# Altium PCB Consult.PcbDoc
Units mm, origin at the board's own origin, x right, y up, seen from the top; angles counter-clockwise.
Board outline 100.08 x 100.03 mm, 2 copper layers (Top Layer, Bottom Layer); 59 components, 40 nets, 265 pads, 0 vias.
Unrouted connection lines stored in the file: 143.
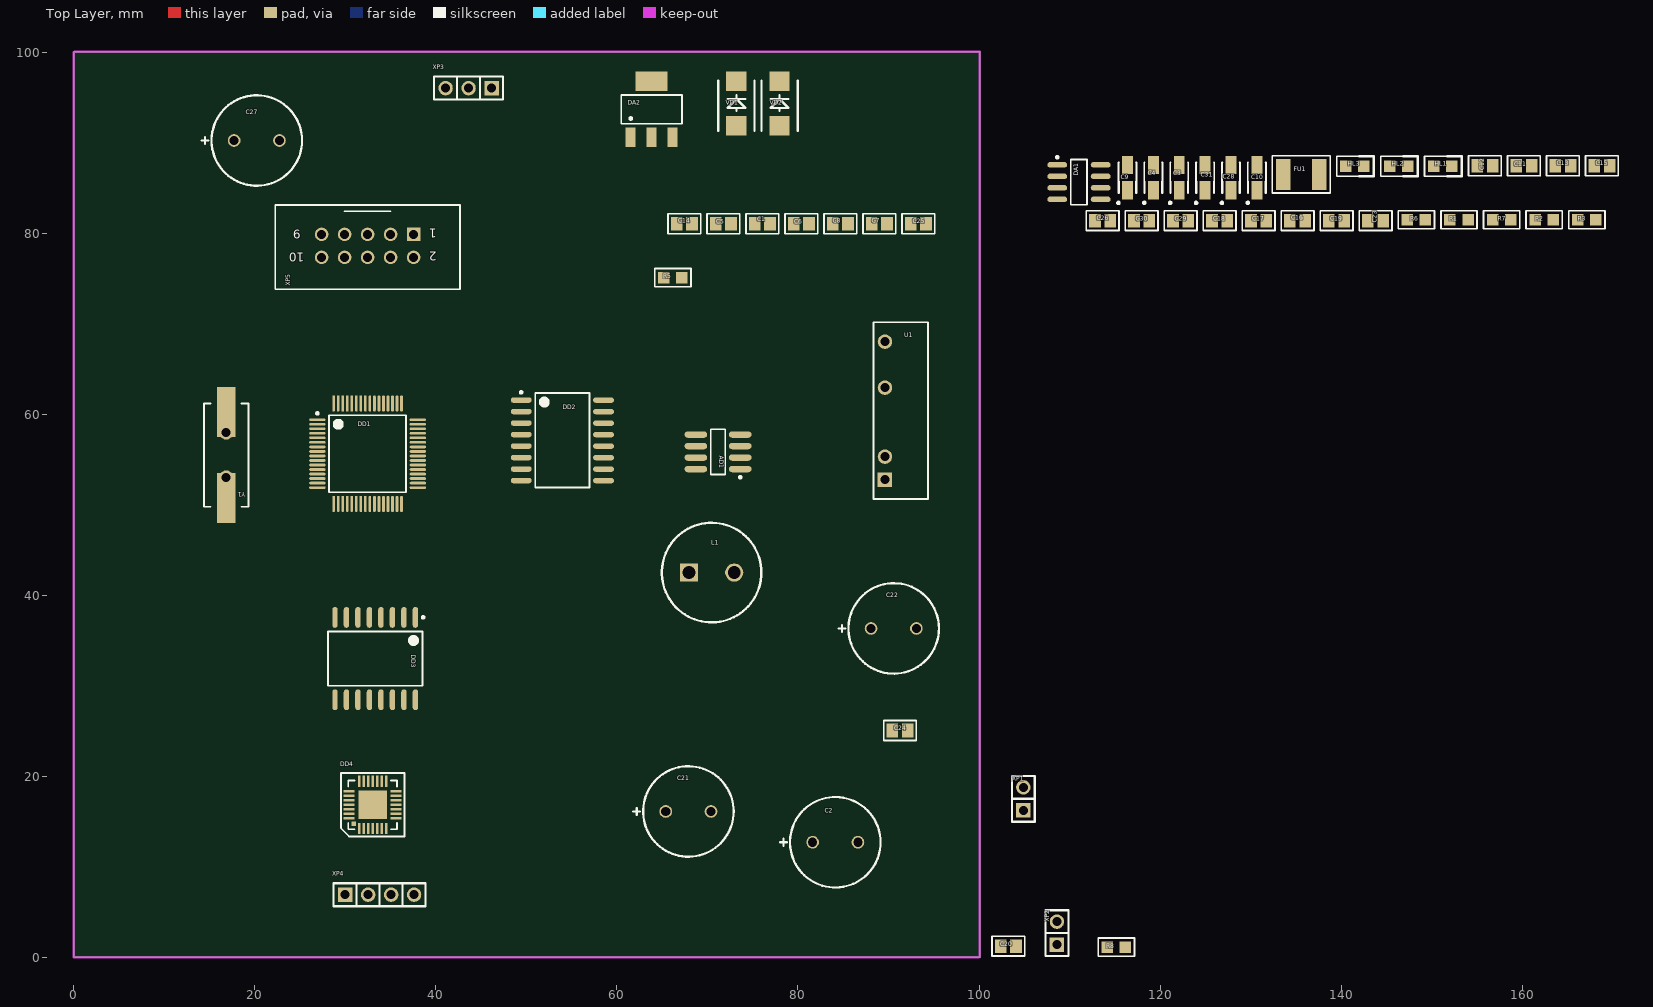
[diagram p0: Top Layer view]
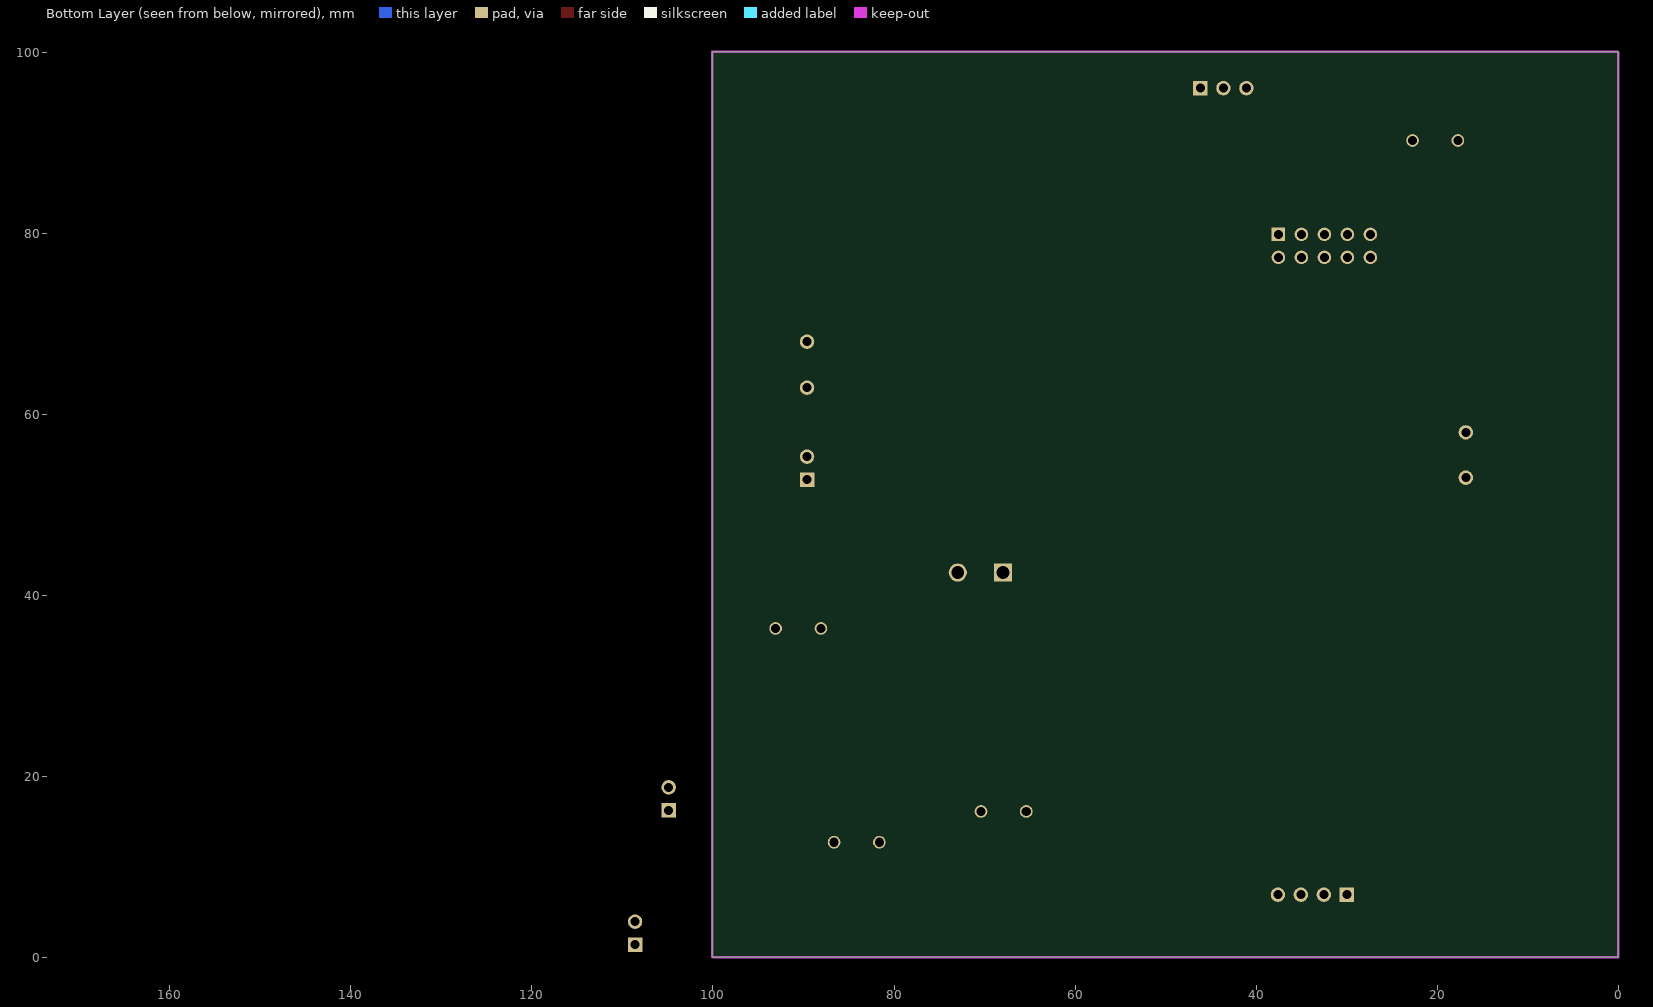
[diagram p1: Bottom Layer view, seen from below]

## Layer stack, top to bottom
Top Solder: solder mask 0.0102, Solder Resist, Dk 3.5
Top Layer: signal copper 0.0356
Dielectric 1: dielectric 0.32, FR-4, Dk 4.8
Bottom Layer: signal copper 0.0356
Bottom Solder: solder mask 0.0102, Solder Resist, Dk 3.5

## Board outline
0,0.025 100,0.025 100.076,0.051 100.076,100.051 0.076,100.051 0,100.025

## Design rules (kind name [scope] priority, off if disabled: settings)
Clearance Clearance_poly [inpolygon] p1: gap=0.3 ignorepadtopadclearanceinfootprint=FALSE
Clearance [All] p2: gap=0.2 ignorepadtopadclearanceinfootprint=FALSE
HoleSize [All] p1: absolutevalues=TRUE maxlimit=5 minlimit=0.3 maxpercent=80.000 minpercent=20.000
MinimumSolderMaskSliver [All] p1: minsoldermaskwidth=0.1
MinimumSolderMaskSliver SilkscreenOverComponentPads [All] p2: minsoldermaskwidth=0.254
PolygonConnect PolygonConnect_vias [isvia] p1: connectstyle=Direct reliefconductorwidth=0.254 reliefentries=4 polygonreliefangle="90 Angle" airgapwidth=0.254
PolygonConnect [All] p2: connectstyle=Relief reliefconductorwidth=0.25 reliefentries=4 polygonreliefangle="90 Angle" airgapwidth=0.254
RoutingVias [All] p1: holewidth=0.4 width=0.8 viastyle="Through Hole" minholewidth=0.4 minwidth=0.8 maxholewidth=0.4 maxwidth=0.8
SolderMaskExpansion SolderMaskExpansion_vias [isvia] p1: expansion=-2 istentingtop=FALSE
SolderMaskExpansion [All] p2: expansion=0.1 istentingtop=FALSE
SupplyNets "Schematic Supply Nets_2" [InNet('3.3V')] p1: voltage=0.000
SupplyNets "Schematic Supply Nets_1" [InNet('-12B')] p2: voltage=0.000
SupplyNets "Schematic Supply Nets" [InNet('GND')] p3: voltage=0.000
Width [All] p1: maxlimit=8 minlimit=0.25 preferedwidth=0.25
28 further rules are at their usual default settings.

## Components (designator, comment, footprint, x,y, rotation, side; value= is the part's Value field where it differs from the comment)
AD1 "MC33660" SO-8_M 71.171,55.855 r180 top
C1 "0.1uF" cap0805 76.074,81.057 r0 top
C2 "470uF" "ECR-EHR 10mm" 84.125,12.725 r0 top
C3 "6.8uF" TC3216-1206-A 122.119,86.156 r90 top
C4 "6.8uF" TC3216-1206-A 119.261,86.156 r90 top
C5 "0.1uF" cap0805 71.766,81.057 r0 top
C6 "0.1uF" cap0805 80.382,81.057 r0 top
C7 "2.2uF" cap0805 88.998,81.057 r0 top
C8 "2.2uF" cap0805 84.69,81.057 r0 top
C9 "6.8uF" TC3216-1206-A 116.403,86.156 r90 top
C10 "6.8uF" TC3216-1206-A 130.693,86.156 r90 top
C11 "0.1uF" cap0805 160.198,87.457 r0 top
C12 "0.1uF" cap0805 155.89,87.457 r0 top
C13 "0.1uF" cap0805 164.506,87.457 r0 top
C14 "0.1uF" cap0805 67.458,81.057 r0 top
C15 "0.1uF" cap0805 168.814,87.457 r0 top
C16 "0.1uF" cap0805 135.19,81.398 r0 top
C17 "20pF" cap0805 130.882,81.398 r0 top
C18 "20pF" cap0805 126.574,81.398 r0 top
C19 "0.1uF" cap0805 139.498,81.398 r0 top
C20 "0.01uF" cap0805 103.251,1.245 r0 top
C21 "470uF" "ECR-EHR 10mm" 67.894,16.129 r0 top
C22 "470uF" "ECR-EHR 10mm" 90.576,36.347 r0 top
C23 "0.1uF" cap0805 143.806,81.398 r0 top
C24 "0.1uF" cap0805 91.274,25.07 r0 top
C25 "0.1uF" cap0805 93.306,81.057 r0 top
C26 "10nF" cap0805 113.65,81.398 r0 top
C27 "470uF" "ECR-EHR 10mm" 20.218,90.246 r0 top
C28 "6.8uF" TC3216-1206-A 127.835,86.156 r90 top
C29 "0.1uF" cap0805 122.266,81.398 r0 top
C30 "0.1uF" cap0805 117.958,81.398 r0 top
C31 "6.8uF" TC3216-1206-A 124.977,86.156 r90 top
DA1 "LM2675M-5" SO-8 111.044,85.652 r0 top
DA2 "LD1117S33" SOT223 63.824,93.691 r0 top
DD1 "STM32F405RGT6" LQFP64 32.461,55.651 r0 top
DD2 "ADUM1402ARW" WSO-16 53.975,57.125 r0 top
DD3 "ADUM1402ARW" WSO-16 33.299,33.02 r270 top
DD4 "CP2103" QFN-28 33.02,16.866 r0 top
FU1 "miniSMDC014F" 1812 135.601,86.507 r0 top
HL1 "KP-2012SGC" Led0805 151.23,87.405 r0 top
HL2 "KP-2012SGC" Led0805 146.37,87.405 r0 top
HL3 "KP-2012SGC" Led0805 141.509,87.405 r0 top
L1 "RLB0914-470KL" RLB0914 70.46,42.52 r0 top
R1 "330" res0805 153.022,81.498 r0 top
R2 "330" res0805 162.438,81.498 r0 top
R3 "330" res0805 167.146,81.498 r0 top
R5 "4.7k" res0805 66.19,75.097 r0 top
R6 "1M" res0805 148.314,81.498 r0 top
R7 "10k" res0805 157.73,81.498 r0 top
R8 "10k" res0805 115.164,1.143 r0 top
U1 "AM1D-0505SH30N" SIP7S 91.389,60.401 r90 top
VD1 "10BQ060" SMB 73.205,94.336 r90 top
VD2 "P6SMBJ12" SMB 77.963,94.336 r90 top
XP1 "PLS-2" PLS2 104.902,17.526 r0 top
XP2 "PLS-2" PLS2 108.61,2.692 r0 top
XP3 "PLS-3" PLS3 43.612,96.037 r90 top
XP4 "PLS-4" PLS4 33.782,6.934 r270 top
XP5 "IDC-10" IDC-10 32.461,78.613 r180 top
Y1 "8MHz" XT49M 16.84,55.499 r270 top

## Footprints (in the part's own frame and the unit in brackets; to place one, negate y for a bottom-side part, rotate by r counter-clockwise, add the part's x,y. Pads: shape width x height; smd on the part's side, far side on the other; paste and mask are expansions set on the pad)
1812 [mm]
  rect 1.6x3.4 smd: 1(-2,0) 2(2,0)
  silkscreen extent -3.2,-2.05 3.2,2.05, body extent -2.35,-1.7 2.35,1.7, height 0.9
cap0805 [mm]
  rect 1.3x1.5 smd: 1(-0.85,0) 2(0.85,0)
  silkscreen extent -1.8,-1.1 1.8,1.1, body extent -1,-0.62 1,0.62, height 0.61
"ECR-EHR 10mm" [mm] "HITANO ECR/EHR capacitor D=10mm"
  round 1.4 hole 1: 1(-2.5,0) 2(2.5,0)
  silkscreen extent -6.1,-5 5,5
IDC-10 [mm]
  rect 1.5x1.5 hole 1: 1(-5.08,-1.27)
  round 1.5 hole 1: 2(-5.08,1.27) 3(-2.54,-1.27) 4(-2.54,1.27) 5(0,-1.27) 6(0,1.27) 7(2.54,-1.27) 8(2.54,1.27) 9(5.08,-1.27) 10(5.08,1.27)
  silkscreen extent -10.2,-4.5 10.2,4.8, body extent -10.2,-4.45 10.2,4.9, height 9.35
Led0805 [mm]
  rect 1.27x1.27 smd: 1(-1,0) 2(1,0)
  silkscreen extent -2,-1.1 2.1,1.1, body extent -1.01,-0.62 1.01,0.62, height 1.11
LQFP64 [mm] "Thin QFP, 64-Leads, Body 10x10mm, Pitch 0.5mm, IPC Medium Density"
  oval 1.8x0.3 smd: 1(-5.55,3.75) 2(-5.55,3.25) 3(-5.55,2.75) 4(-5.55,2.25) 5(-5.55,1.75) 6(-5.55,1.25) 7(-5.55,0.75) 8(-5.55,0.25) 9(-5.55,-0.25) 10(-5.55,-0.75) 11(-5.55,-1.25) 12(-5.55,-1.75) 13(-5.55,-2.25) 14(-5.55,-2.75) 15(-5.55,-3.25) 16(-5.55,-3.75) 33(5.55,-3.75) 34(5.55,-3.25) 35(5.55,-2.75) 36(5.55,-2.25) 37(5.55,-1.75) 38(5.55,-1.25) 39(5.55,-0.75) 40(5.55,-0.25) 41(5.55,0.25) 42(5.55,0.75) 43(5.55,1.25) 44(5.55,1.75) 45(5.55,2.25) 46(5.55,2.75) 47(5.55,3.25) 48(5.55,3.75)
  oval 0.3x1.8 smd: 17(-3.75,-5.55) 18(-3.25,-5.55) 19(-2.75,-5.55) 20(-2.25,-5.55) 21(-1.75,-5.55) 22(-1.25,-5.55) 23(-0.75,-5.55) 24(-0.25,-5.55) 25(0.25,-5.55) 26(0.75,-5.55) 27(1.25,-5.55) 28(1.75,-5.55) 29(2.25,-5.55) 30(2.75,-5.55) 31(3.25,-5.55) 32(3.75,-5.55) 49(3.75,5.55) 50(3.25,5.55) 51(2.75,5.55) 52(2.25,5.55) 53(1.75,5.55) 54(1.25,5.55) 55(0.75,5.55) 56(0.25,5.55) 57(-0.25,5.55) 58(-0.75,5.55) 59(-1.25,5.55) 60(-1.75,5.55) 61(-2.25,5.55) 62(-2.75,5.55) 63(-3.25,5.55) 64(-3.75,5.55)
  silkscreen extent -5.67,-4.25 4.25,4.57, body extent -6,-6 6,6, height 1.6
PLS2 [mm]
  rect 1.6x1.6 hole 1: 1(0,-1.27)
  round 1.6 hole 1: 2(0,1.27)
  silkscreen extent -1.27,-2.54 1.27,2.53, body extent -1.27,-2.54 1.27,2.54, height 8.54
PLS3 [mm]
  rect 1.6x1.6 hole 1: 1(0,-2.54)
  round 1.6 hole 1: 2(0,0) 3(0,2.54)
  silkscreen extent -1.27,-3.81 1.27,3.81, body extent -1.27,-3.81 1.27,3.81, height 8.44
PLS4 [mm]
  rect 1.6x1.6 hole 1: 1(0,-3.81)
  round 1.6 hole 1: 2(0,-1.27) 3(0,1.27) 4(0,3.81)
  silkscreen extent -1.27,-5.08 1.27,5.08, body extent -1.27,-5.08 1.27,5.08, height 8.44
QFN-28 [mil]
  rect 124.02x124.02 smd: 0(0,0)
  rect 11x48 smd: 1(-59.05,-102.36) 2(-39.37,-102.36) 3(-19.69,-102.36) 4(0,-102.36) 5(19.68,-102.36) 6(39.38,-102.36) 7(59.07,-102.36) 15(59.07,102.35) 16(39.38,102.35) 17(19.68,102.35) 18(0,102.35) 19(-19.69,102.35) 20(-39.37,102.35) 21(-59.05,102.35)
  rect 48x11 smd: 8(102.36,-59.06) 9(102.36,-39.36) 10(102.36,-19.68) 11(102.36,0) 12(102.36,19.68) 13(102.36,39.37) 14(102.36,59.06) 22(-102.35,59.06) 23(-102.35,39.37) 24(-102.35,19.68) 25(-102.35,0) 26(-102.35,-19.68) 27(-102.35,-39.36) 28(-102.35,-59.06)
  rect 19.66x19.66 smd: 29(-82.67,-82.68)
  silkscreen extent -138,-138 138,138, body extent -99,-99 99,99, height 36
res0805 [mm]
  rect 1.27x1.27 smd: 1(-1,0) 2(1,0)
  silkscreen extent -2,-1 2,1, body extent -1,-0.62 1,0.62, height 0.61
RLB0914 [mm]
  rect 2x2 hole 1.4: 1(-2.5,0)
  round 2 hole 1.4: 2(2.5,0)
  silkscreen extent -5.5,-5.5 5.5,5.5, body extent -4.35,-4.35 4.35,4.35, height 12.3
SIP7S [mm]
  rect 1.6x1.6 hole 1: 1(-7.62,1.778)
  round 1.6 hole 1: 2(-5.08,1.778) 3(2.54,1.778) 4(7.62,1.778)
  silkscreen extent -9.77,-2.97 9.78,3.05, body extent -9.99,-2.71 10.01,3.29, height 9.31
SMB [mm]
  rect 2.16x2.26 smd: 1(-2.45,0) 2(2.45,0)
  silkscreen extent -3,-2 2.5,2, body extent -3,-1.95 2.5,1.95, height 2.42
SO-8 [mm] "8-Pin Small Outline Integrated Circuit 1.27 mm Pitch, IPC Medium Density"
  oval 2.2x0.6 smd: 1(-2.4,1.905) 2(-2.4,0.635) 3(-2.4,-0.635) 4(-2.4,-1.905) 5(2.4,-1.905) 6(2.4,-0.635) 7(2.4,0.635) 8(2.4,1.905)
  silkscreen extent -2.52,-2.5 0.9,2.88, body extent -3,-2.45 3,2.45, height 1.6
SO-8_M [mm] "8-Pin Small Outline Integrated Circuit 1.27 mm Pitch, IPC Low Density"
  oval 2.5x0.7 smd: 1(-2.45,1.905) 2(-2.45,0.635) 3(-2.45,-0.635) 4(-2.45,-1.905) 5(2.45,-1.905) 6(2.45,-0.635) 7(2.45,0.635) 8(2.45,1.905)
  silkscreen extent -2.58,-2.5 0.8,2.93, body extent -2,-2.5 2,2.5, height 1.75
SOT223 [mm] "SOT-223/SC-73; 4 Leads; Body 6.7 x 7.3 mm, inc. leads (LxW max)"
  rect 1.1x2.15 smd: 1(-2.3,-3.1) 2(0,-3.1) 3(2.3,-3.1)
  rect 3.5x2.15 smd: 4(0,3.1)
  silkscreen extent -3.35,-1.6 3.35,1.6, body extent -3.25,-3.48 3.25,3.48, height 1.69
TC3216-1206-A [mm] "Capacitor, SM Tantalum; Body 3.2 x 1.6 mm (LxW typ)"
  rect 2x1.2 smd: 1(-1.4,0) 2(1.4,0)
  silkscreen extent -2.92,-1 1.7,1.12, body extent -1.6,-0.8 1.6,0.8, height 1.62
WSO-16 [mm] "20-Pin Small Outline Integrated Circuit (SOIC20), IPC Medium Density"
  oval 2.3x0.6 smd: 1(-4.55,4.445) 2(-4.55,3.175) 3(-4.55,1.905) 4(-4.55,0.635) 5(-4.55,-0.635) 6(-4.55,-1.905) 7(-4.55,-3.175) 8(-4.55,-4.445) 9(4.55,-4.445) 10(4.55,-3.175) 11(4.55,-1.905) 12(4.55,-0.635) 13(4.55,0.635) 14(4.55,1.905) 15(4.55,3.175) 16(4.55,4.445)
  silkscreen extent -4.67,-5.21 3,5.42, body extent -5.31,-5.25 5.31,5.25, height 2.62
XT49M [mm]
  round 1.6 hole 1: 1(2.5,0) 2(-2.5,0)
  rect 5.5x2 smd: 1(4.75,0) 2(-4.75,0)
  silkscreen extent -5.7,-2.45 5.7,2.45, body extent -6.4,-2.41 6.4,2.41, height 4.31

## Part data
C1 C5 C6 C7 C8 C11 C12 C13 C14 C15 C16 C17 C18 C19 C20 C23 C24 C25 C26 C29 C30: library part cap0805, "Керамический конденсатор, SMD", Package="SMD 0805", Group=Конденсаторы, NPads=2, Part Number=cap0805, SType=SMD
  C1 C5 C6 C11 C12 C13 C14 C15 C16 C19 C23 C24 C25 C29 C30: ValueSCH=0.1uF
  C7 C8: ValueSCH=2.2uF
  C17 C18: ValueSCH=20pF
  C20: ValueSCH=0.01uF
  C26: ValueSCH=10nF
C2 C21 C22 C27: library part "ECR/EHR/EXR D=10mm", "Алюминиевый конденсатор Hitano", Package=ECR/HER, Part Number="ECR/EHR/EXR D=10mm", Group=Конденсаторы, NPads=2, SType=TH, ValueSCH=470uF
C3 C4 C9 C10 C28 C31: library part capA, "Танталовый конденсатор, SMD", Package="SMD A", Group=Конденсаторы, NPads=2, Part Number=capA, SType=SMD, ValueSCH=6.8uF
DA1: "Понижающий DC-DC 5V 1А", Package=SO-8, Group=Микросхемы, NPads=8, Part Number=LM2675M-5, SType=SMD, ValueSCH=LM2675M-5
DA2: "Линейный стабилизатор 3.3V", Package=SOT223, Group=Микросхемы, NPads=4, Part Number=LD1117S33, SType=SMD, ValueSCH=LD1117S33
DD1: "Микроконтроллер 32 бит CORTEX M4", Package=LQFP64, Group=Микросхемы, NPads=64, Part Number=STM32F405RGT6, SType=SMD, ValueSCH=STM32F405RGT6
DD2 DD3: "Цифровой оптрон 4 канала", Package=SO-16W, Group=Микросхемы, NPads=16, Part Number=ADUM1402ARW, SType=SMD, ValueSCH=ADUM1402ARW
DD4: "Чип USB -> UART", Package=QFN-28, Group=Микросхемы, NPads=28, Part Number=CP2103, SType=SMD, ValueSCH=CP2103
FU1: "SMD Предохранитель 0.14А 60B", Package=smd1812, Group=Предохранитель, NPads=2, Part Number=miniSMDC014F, SType=SMD, ValueSCH=miniSMDC014F
HL1 HL2 HL3: "SMD светодиод зеленый", Package="SMD 0805", Group=Диоды, NPads=2, Part Number=KP-2012SGC, SType=SMD, ValueSCH=KP-2012SGC
L1: Package=RLB0914, Group=Индуктивности, NPads=2, Part Number=RLB0914-470KL, SType=TH, ValueSCH=RLB0914-470KL
R1 R2 R3 R5 R6 R7 R8: library part res0805, "Резистор 0.125 W, SMD", Package="SMD 0805", Group=Резисторы, NPads=2, Part Number=res0805, SType=SMD
  R1 R2 R3: ValueSCH=330
  R5: ValueSCH=4.7k
  R6: ValueSCH=1M
  R7 R8: ValueSCH=10k
U1: "Преобразователь 1Вт 5В ->5В", Package=SIP7, Group=Микросхемы, NPads=4, Part Number=AM1D-0505SH30N, SType=TH, ValueSCH=AM1D-0505SH30N
VD1: "Диод шоттки 60V 1A", Package=SMB, Group=Диоды, NPads=2, Part Number=10BQ060, SType=SMD, ValueSCH=10BQ060
VD2: "Супрессор 12В", Package=SMB, Group=Диоды, NPads=2, Part Number=P6SMBJ12, SType=SMD, ValueSCH=P6SMBJ12
XP1 XP2: "Однорядный штыревой разъем 2 шаг 2.54мм", Group=Разъемы, NPads=2, Part Number=PLS-2, SType=TH, ValueSCH=PLS-2
XP3: "Однорядный штыревой разъем 3 шаг 2.54мм", Group=Разъемы, NPads=3, Part Number=PLS-3, SType=TH, ValueSCH=PLS-3
XP4: "Однорядный штыревой разъем 4 шаг 2.54мм", Group=Разъемы, NPads=4, Part Number=PLS-4, SType=TH, ValueSCH=PLS-4
XP5: "Вилка на плату 5х2 контактов шаг 2.54мм", Group=Разъемы, NPads=10, Part Number=IDC-10, SType=TH, ValueSCH=IDC-10
Y1: library part HC-49/U-S, "Кварцевый осциллятор 3.2 - 60 MHz", Group=Резонаторы, HelpURL=\DATA\HC-49.pdf, NPads=2, Part Number=HC-49/U-S, SType=TH, ValueSCH=8MHz

## Nets (pads, with @x,y where several pads share a name; then routed paths per layer and width w, separated by ;. In a path a pad name is that pad's centre, name@x,y a point inside that pad or via, vN(x,y) a via of type N, cw(c..) or ccw(c..) an arc to the next point about the centre after c; other vN are vias at no path point)
3.3V: C4.1 C6.1 C10.1 C12.1 C13.1 C14.1 C15.1 C16.1 C31.1 DA2.2 DA2.4 DD1.1 DD1.13 DD1.19 DD1.32 DD1.48 DD1.64 DD2.1 DD2.7 DD3.1 DD3.7 HL1.1 HL2.1 HL3.1 R8.2
5V: C22.1 C23.1 DA2.3 U1.4 XP5.2
12V: C21.1 C24.1 DA1.7 VD1.1 XP3.1
+5V: AD1.7 AD1.8 C3.1 C5.1 C9.1 C11.1 C25.1 C27.1 C28.1 C29.1 C30.1 DA1.4 DD2.10 DD2.16 DD3.10 DD3.16 DD4.5 DD4.6 DD4.10 DD4.13 DD4.14 DD4.15 DD4.20 DD4.21 L1.2 R5.2 U1.1
-12B: C1.2 C2.2 C3.2 C5.2 C21.2 C24.2 C25.2 C27.2 DA1.6 DD2.9 DD2.15 U1.2 VD2.1
-12V: AD1.3 XP3.2
Boot0: DD1.60 R7.1 XP1.1
D+: DD4.3 XP4.2
D-: DD4.4 XP4.3
GND: C4.2 C6.2 C7.2 C8.2 C10.2 C12.2 C13.2 C14.2 C15.2 C16.2 C17.2 C18.2 C20.2 C22.2 C23.2 C31.2 DA1.2 DA1.3 DA2.1 DD1.12 DD1.18 DD1.63 DD2.2 DD2.8 DD3.2 DD3.8 R7.2 U1.3 XP2.2 XP5.8
GUSB: C9.2 C11.2 C19.1 DD3.9 DD3.15 DD4.0 DD4.2 DD4.29 XP4.1
ISO: FU1.1 XP3.3
NetAD1_1: AD1.1 C1.1 C2.1 VD1.2
NetAD1_4: AD1.4 FU1.2 VD2.2
NetC7_1: C7.1 DD1.31
NetC8_1: C8.1 DD1.47
NetC26_1: C26.1 DA1.1
NetC26_2: C26.2 DA1.8 L1.1
NetC28_2: C28.2 C29.2 C30.2
NetDD1_26: DD1.26 R1.2
NetDD1_56: DD1.56 R2.2
NetDD1_61: DD1.61 R3.2
NetDD4_9: DD4.9 R5.1
NetHL1_2: HL1.2 R1.1
NetHL2_2: HL2.2 R2.1
NetHL3_2: HL3.2 R3.1
Reset: C20.1 DD1.7 R8.1 XP2.1
RX: AD1.6 DD2.12
RX1: DD1.43 DD2.3
RX3: DD1.30 DD3.5
RXU: DD3.14 DD4.24
SWCLK: DD1.49 XP5.6
SWDIO: DD1.46 XP5.10
TX: AD1.5 DD2.14
TX1: DD1.42 DD2.5
TX3: DD1.29 DD3.3
TXU: DD3.12 DD4.25
VBus: C19.2 DD4.7 DD4.8 XP4.4
XTAL1: C17.1 DD1.5 R6.2 Y1.2
XTAL2: C18.1 DD1.6 R6.1 Y1.1
pads on no net: AD1.2 DA1.5 DD1.2 DD1.3 DD1.4 DD1.8 DD1.9 DD1.10 DD1.11 DD1.14 DD1.15 DD1.16 DD1.17 DD1.20 DD1.21 DD1.22 DD1.23 DD1.24 DD1.25 DD1.27 DD1.28 DD1.33 DD1.34 DD1.35 DD1.36 DD1.37 DD1.38 DD1.39 DD1.40 DD1.41 DD1.44 DD1.45 DD1.50 DD1.51 DD1.52 DD1.53 DD1.54 DD1.55 DD1.57 DD1.58 DD1.59 DD1.62 DD2.4 DD2.6 DD2.11 DD2.13 DD3.4 DD3.6 DD3.11 DD3.13 DD4.1 DD4.11 DD4.12 DD4.16 DD4.17 DD4.18 DD4.19 DD4.22 DD4.23 DD4.26 DD4.27 DD4.28 XP1.2 XP5.1 XP5.3 XP5.4 XP5.5 XP5.7 XP5.9

## Keep-outs
Keep-Out Layer:
  lines w0.254: 0,100.025 0,0.025 100,0.025 ; 0.076,100.051 100.076,100.051 100.076,0.051

## Text inside footprints (layer, text, board x,y; h text height)
XP5: Top Overlay "1" at 40.081,80.518 h0.95 r180; Top Overlay "2" at 40.081,77.978 h0.95 r180; Top Overlay "9" at 25.095,80.391 h0.95 r180; Top Overlay "10" at 25.476,77.851 h0.95 r180